# EAGLE board Board (EAGLE 9.7.0)
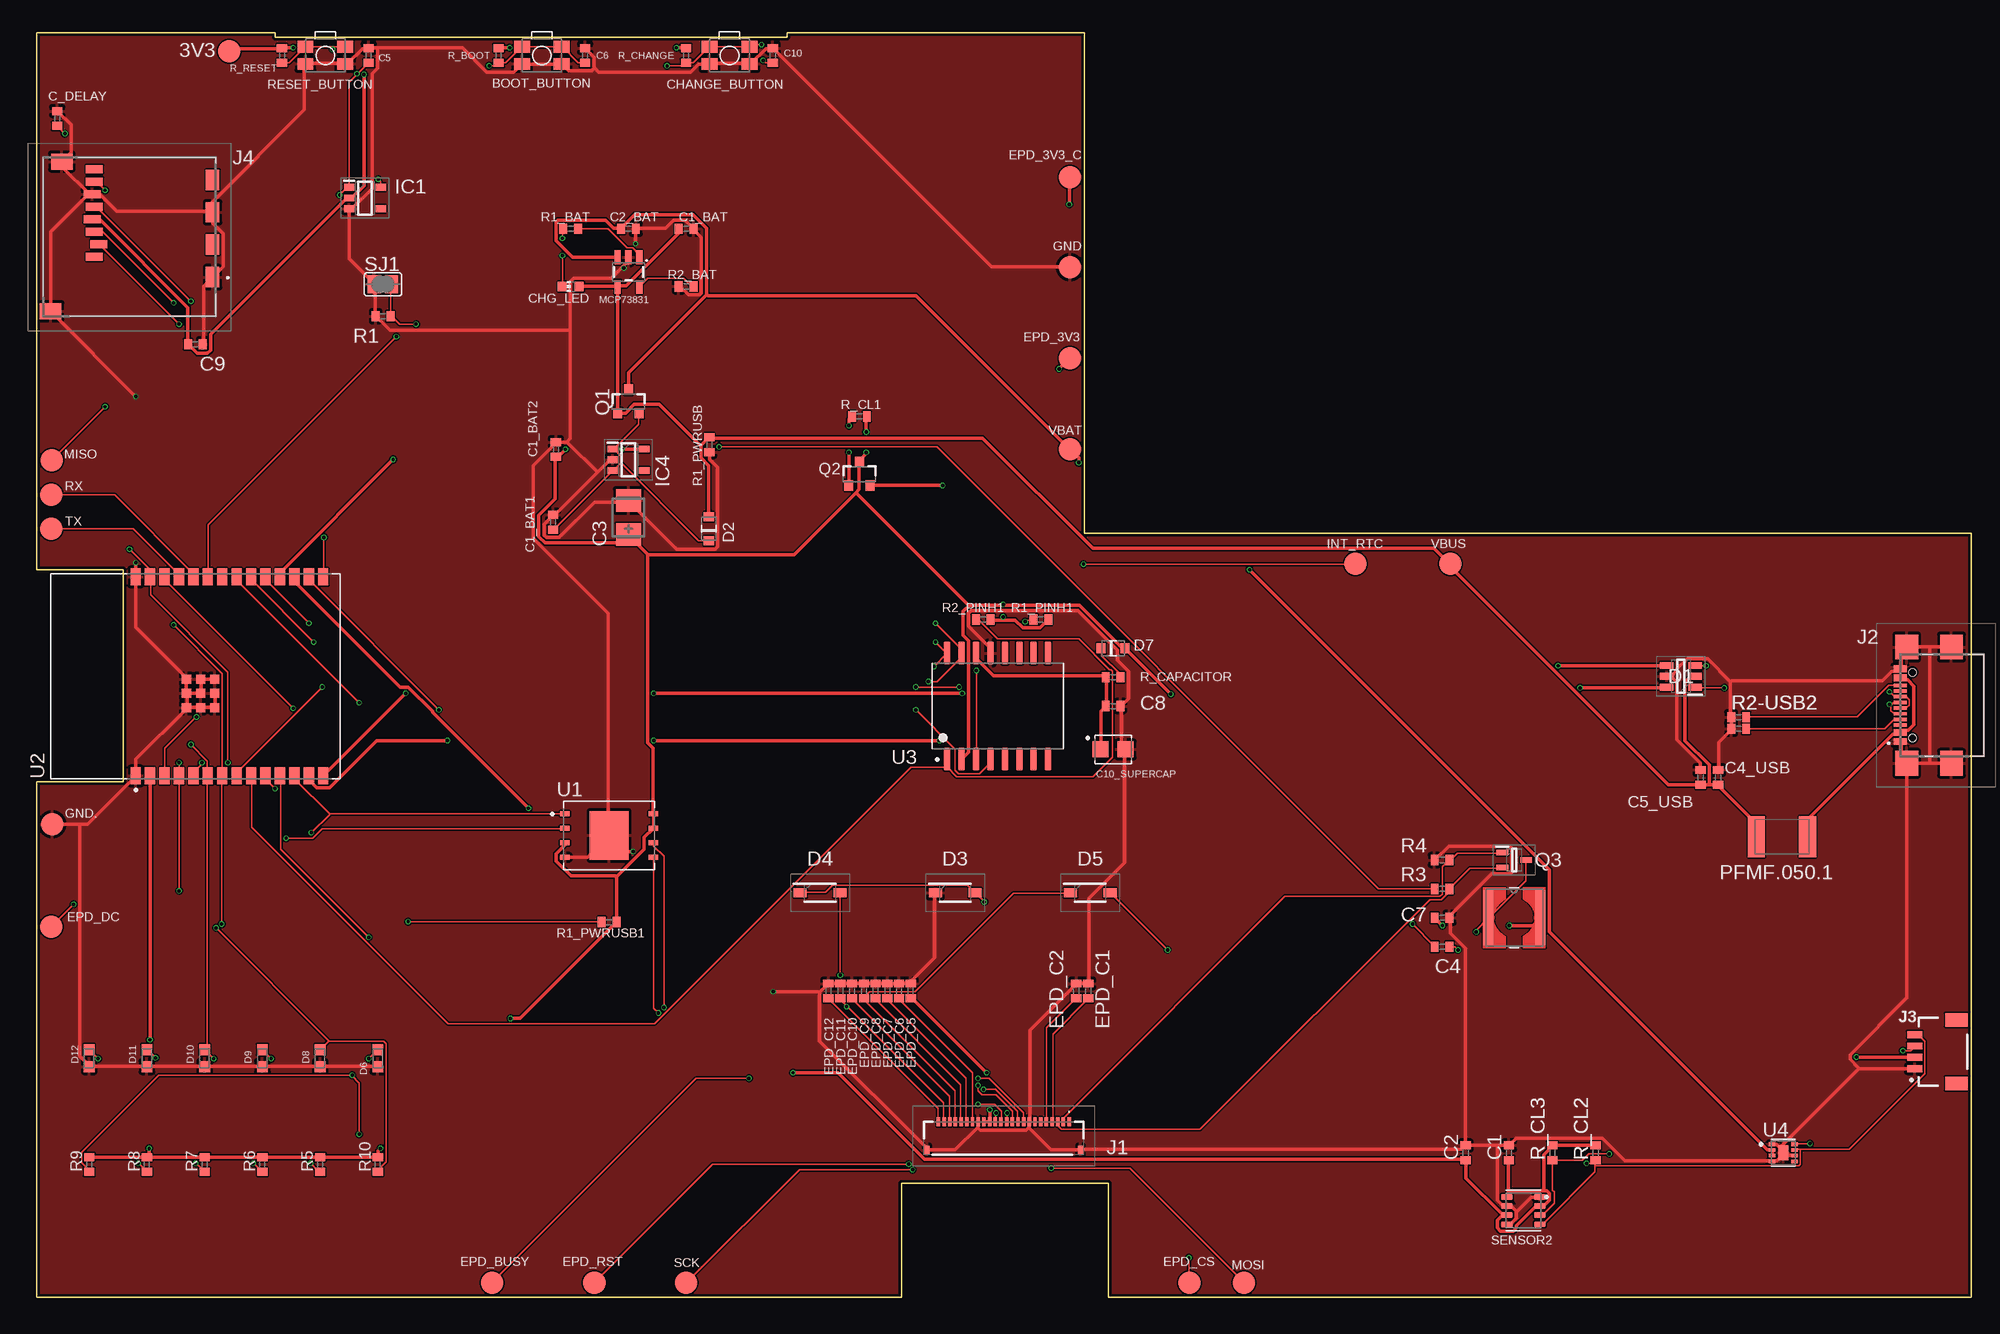
[diagram p0: board, top side]
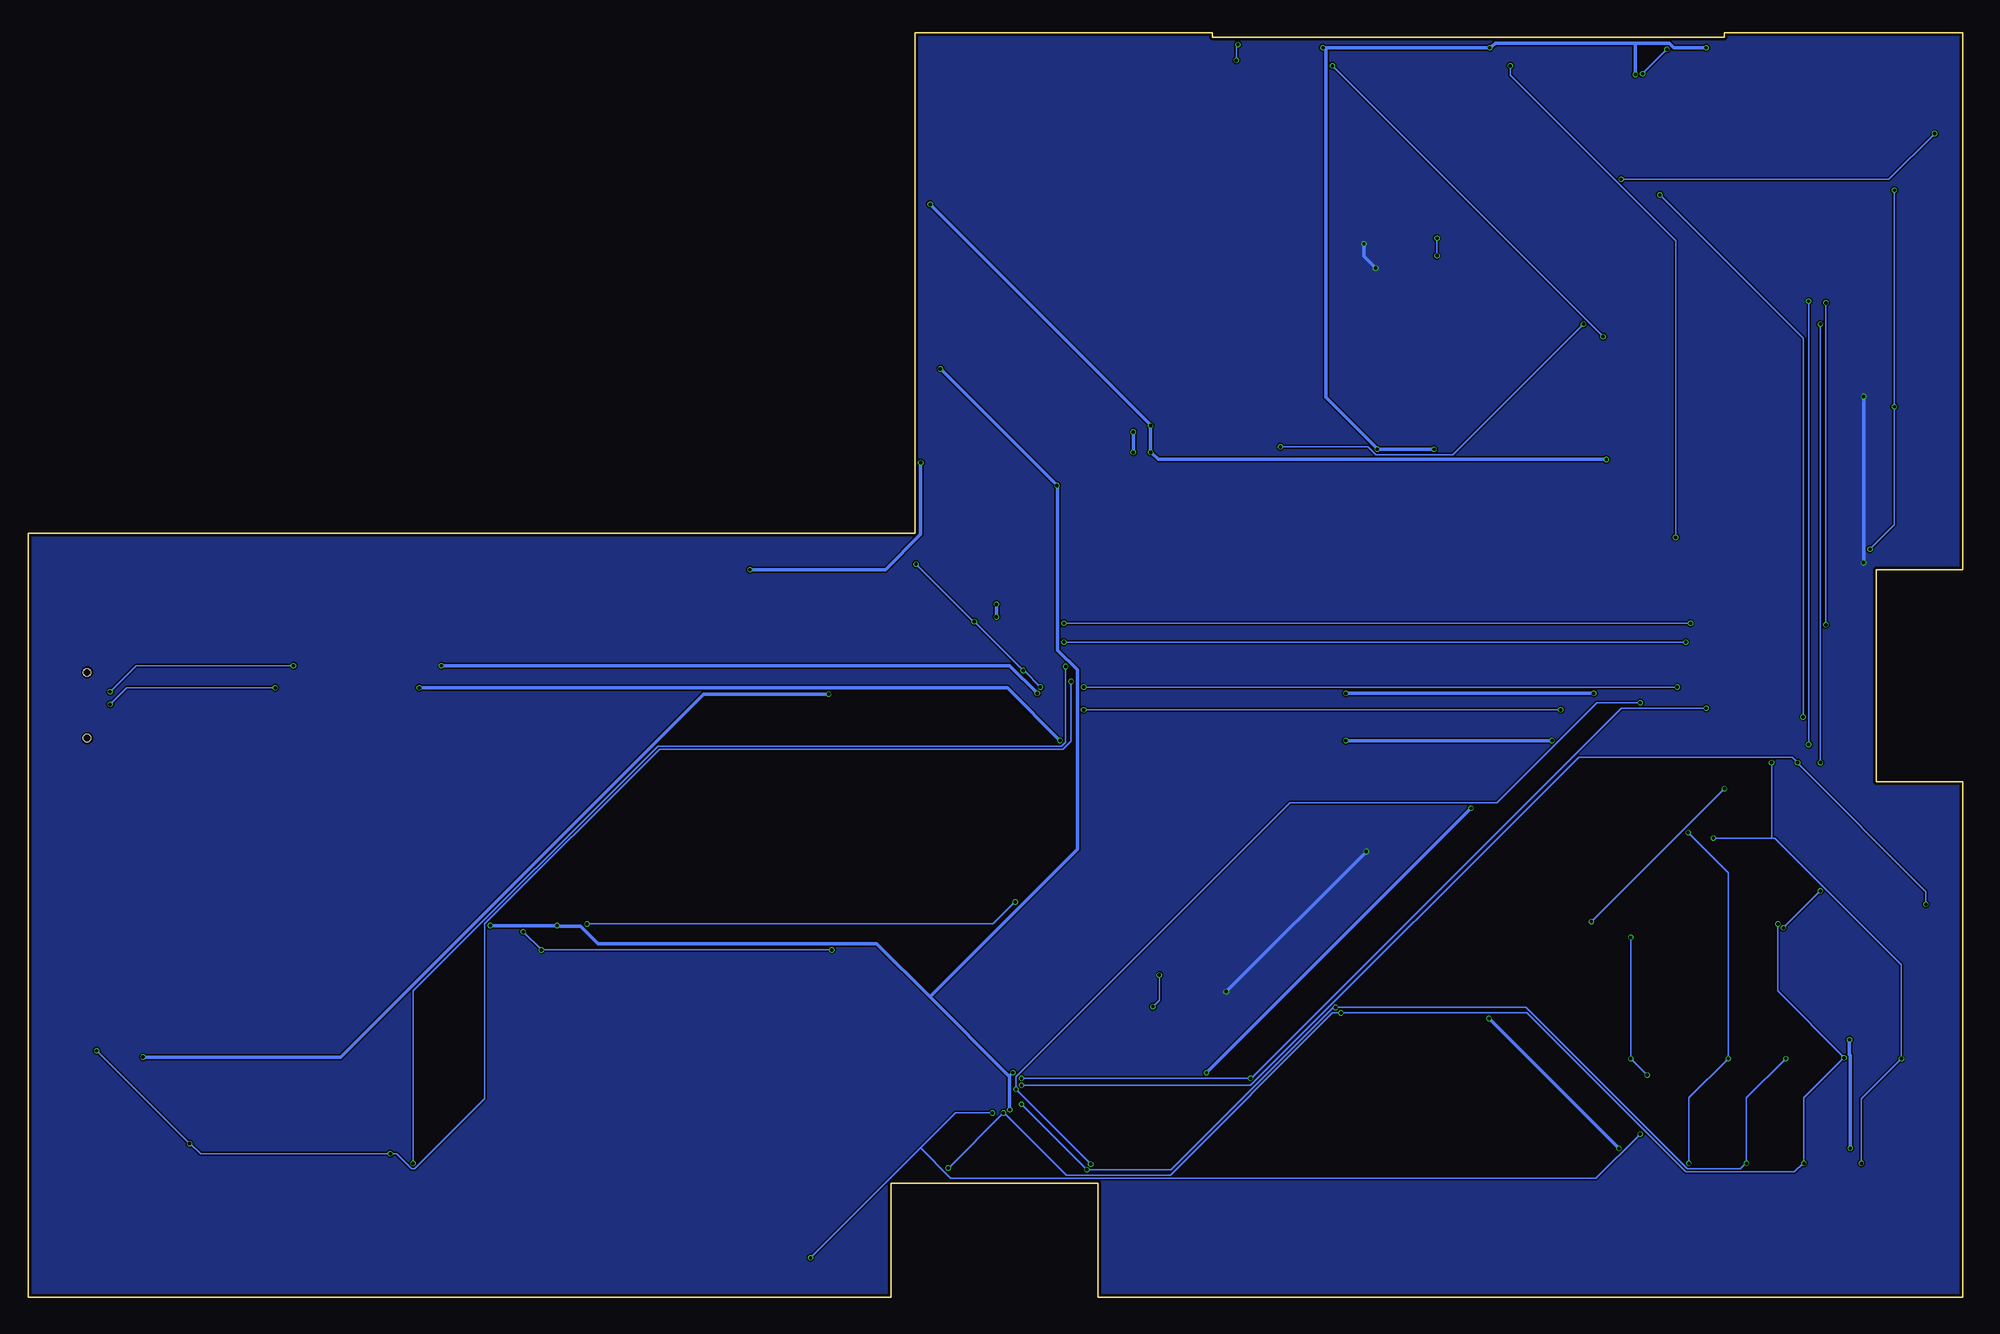
[diagram p1: board, bottom side, seen from below]

Size 170.2 x 111.2 mm. Coordinates in mm from the lower left corner, seen from the top.
Outline: 0,0 76.11,0 76.11,10 94.31,10 94.31,0 170.2,0 170.2,67.2 92.19,67.2 92.19,111.2 66.04,111.2 66.04,110.83 21,110.83 21,111.2 0,111.2 0,64 7.62,64 7.62,45.35 0,45.35 0,0
Copper layers (1*16): Top 0.035mm / dielectric 1.6mm / Bottom 0.035mm
Design rules "jlcpcb-2layers.dru *": minimum track width 0.15mm, minimum drill 0.3mm, track to track 5mil, track to pad 5mil, pad to pad 5mil, via to via 5mil, smd to smd 0.1mm, copper to edge 0.2mm, drill to drill 6mil, minimum pad ring 10mil, minimum via ring 3mil, stop-mask expansion 4mil, vias tented up to drill 0mil, thermal gap 10mil
Net classes: 0 default: width 0.15 mm; 1 Copper Power Pins: width 0.3 mm

## Footprints (pad centres in the part's own frame; a part is rotated, then mirrored left to right if it is on the bottom)
TP20R = smd 2 x 2: TP 0,0
MYBUTTON = smd 1.4 x 1.05: 1 1.75,0.75; 2 -1.75,0.75; 3 -1.75,-0.75; 4 1.75,-0.75
EAGLE-LTSPICE_C0402 = smd 0.7 x 0.9: 1 -0.65,0; 2 0.65,0
RCL_CT3528 = smd 2 x 2.2: + -1.5,0; - 1.5,0
ESP32_WROVER_EAGLE-LTSPICE_C0402 = smd 0.7 x 0.9: 1 -0.65,0; 2 0.65,0
CAPCP3225X100N = smd 1.4 x 1.4: 1 -1.1,0; 2 1.1,0
ADAFRUIT_CHIP-LED0603 = smd 0.8 x 0.8: A 0,-0.75; C 0,0.75
SOT95P280X145-6N = smd 1.2 x 0.6: 1 -1.25,0.95; 2 -1.25,0; 3 -1.25,-0.95; 4 1.25,-0.95; 5 1.25,0; 6 1.25,0.95
ESP32_WROVER_AVX---SD0805S020S1R0_AVX_SD0805S020S1R0_0 = smd 0.8 x 0.9: 1 -1.05,0; 2 1.05,0
SOD3716X135N = smd 1.15 x 0.8: 1 -1.75,0; 2 1.75,0
DIOC1608X36N = smd 0.97 x 0.94: 1 -0.75,0; 2 0.75,0
SOT95P280X125-5N = smd 0.9 x 0.6: 1 -1.4,0.95; 2 -1.4,0; 3 -1.4,-0.95; 4 1.4,-0.95; 5 1.4,0.95
SOT95P280X120-5N = smd 0.9 x 0.6: 1 -1.4,0.95; 2 -1.4,0; 3 -1.4,-0.95; 4 1.4,-0.95; 5 1.4,0.95
FH34SRJ24S05SH99 = smd 0.3 x 0.8: 1 5.75,1.45; 2 5.25,1.45; 3 4.75,1.45; 4 4.25,1.45; 5 3.75,1.45; 6 3.25,1.45; 7 2.75,1.45; 8 2.25,1.45; 9 1.75,1.45; 10 1.25,1.45; 11 0.75,1.45; 12 0.25,1.45; 13 -0.25,1.45; 14 -0.75,1.45; 15 -1.25,1.45; 16 -1.75,1.45; 17 -2.25,1.45; 18 -2.75,1.45; 19 -3.25,1.45; 20 -3.75,1.45; 21 -4.25,1.45; 22 -4.75,1.45; 23 -5.25,1.45; 24 -5.75,1.45 | smd 0.4 x 0.8: MP1 6.75,-1.05; MP2 -6.75,-1.05
SAMACSYS_PARTS_USB4110GFA = smd 0.3 x 1.15: A1 -3.35,3.678; A4 -2.55,3.678; A5 -1.25,3.678; A6 -0.25,3.678; A7 0.25,3.678; A8 1.25,3.678; A9 2.55,3.678; A12 3.35,3.678; B1 3.05,3.678; B4 2.25,3.678; B5 1.75,3.678; B6 0.75,3.678; B7 -0.75,3.678; B8 -1.75,3.678; B9 -2.25,3.678; B12 -3.05,3.678 | smd 2.18 x 2: MP1 -5.11,-0.827; MP2 5.11,-0.827; MP3 -5.11,3.103; MP4 5.11,3.103 | hole 0.65: -2.89,2.603; 2.89,2.603
JST04_1MM_RA = smd 0.6 x 1.35: 1 -1.5,0; 2 -0.5,0; 3 0.5,0; 4 1.5,0 | smd 1.2 x 2: NC1 2.8,-3.675; NC2 -2.8,-3.675
112ATAARR03ATTEND = smd 1.8 x 1.2: G1 10.6,10.4; G2 4.9,10.4; S1 7.75,10.4; S2 2.05,10.4 | smd 1.4 x 1.9: G3 13.6,-3.85; G4 0.45,-2.85 | smd 0.7 x 1.5: P1 8.8,0; P2 7.7,0.4; P3 6.6,0; P4 5.5,-0.2; P5 4.4,0; P6 3.3,-0.2; P7 2.2,0; P8 1.1,0
IND_4828-WE-TPC_WRE = smd 0.889 x 4.826: 1 -2.286,0; 2 2.286,0
ESP32_WROVER_SPARKFUN-IC-POWER_SOT23-5 = smd 0.55 x 1.2: 1 -0.95,-1.3; 2 0,-1.3; 3 0.95,-1.3; 4 0.95,1.3; 5 -0.95,1.3
ESP32C6_VARISTOR_CT/CN1812 = smd 1.5 x 3.6: 1 -2.25,0; 2 2.25,0
ESP32_WROVER_SPARKFUN-DISCRETESEMI_SOT23-3 = smd 0.8 x 0.9: 1 -0.95,-1; 2 0.95,-1; 3 0,1.1
SOT65P210X110-3N = smd 1.05 x 0.5: 1 -1.05,0.65; 2 -1.05,-0.65; 3 1.05,0
ESP32_WROVER_EAGLE-LTSPICE_R0402 = smd 0.7 x 0.9: 1 -0.65,0; 2 0.65,0
ESP32_WROVER_BME680_PSON80P300X300X100-8N = smd 1.016 x 0.5: 1 1.458,1.2; 2 1.458,0.4; 3 1.458,-0.4; 4 1.458,-1.2; 5 -1.458,-1.22; 6 -1.458,-0.4; 7 -1.458,0.4; 8 -1.458,1.2
SJ = smd 1.168 x 1.6: 1 -0.762,0; 2 0.762,0
SON127P600X800X80-9N = smd 0.94 x 0.44: 1 -3.895,1.905; 2 -3.895,0.635; 3 -3.895,-0.635; 4 -3.895,-1.905; 5 3.895,-1.905; 6 3.895,-0.635; 7 3.895,0.635; 8 3.895,1.905 | smd 3.4 x 4.3: 9 0,0
XCVR_ESP32-C6-WROOM-1-N8 = smd 1.5 x 0.9: 1 -8.75,5.26; 2 -8.75,3.99; 3 -8.75,2.72; 4 -8.75,1.45; 5 -8.75,0.18; 6 -8.75,-1.09; 7 -8.75,-2.36; 8 -8.75,-3.63; 9 -8.75,-4.9; 10 -8.75,-6.17; 11 -8.75,-7.44; 12 -8.75,-8.71; 13 -8.75,-9.98; 14 -8.75,-11.25; 15 8.75,-11.25; 16 8.75,-9.98; 17 8.75,-8.71; 18 8.75,-7.44; 19 8.75,-6.17; 20 8.75,-4.9; 21 8.75,-3.63; 22 8.75,-2.36; 23 8.75,-1.09; 24 8.75,0.18; 25 8.75,1.45; 26 8.75,2.72; 27 8.75,3.99; 28 8.75,5.26 | smd 0.8 x 0.8: 29_1 -2.755,0.79; 29_2 -1.505,0.79; 29_3 -0.255,0.79; 29_4 -2.755,-0.46; 29_5 -1.505,-0.46; 29_6 -0.255,-0.46; 29_7 -2.755,-1.71; 29_8 -1.505,-1.71; 29_9 -0.255,-1.71
SOIC127P1032X265-16N = smd 2.05 x 0.59: 1 -4.655,4.445; 2 -4.655,3.175; 3 -4.655,1.905; 4 -4.655,0.635; 5 -4.655,-0.635; 6 -4.655,-1.905; 7 -4.655,-3.175; 8 -4.655,-4.445; 9 4.655,-4.445; 10 4.655,-3.175; 11 4.655,-1.905; 12 4.655,-0.635; 13 4.655,0.635; 14 4.655,1.905; 15 4.655,3.175; 16 4.655,4.445
SON50P200X200X80-9N = smd 0.635 x 0.305: 1 -0.985,0.75; 2 -0.985,0.25; 3 -0.985,-0.25; 4 -0.985,-0.75; 5 0.985,-0.75; 6 0.985,-0.25; 7 0.985,0.25; 8 0.985,0.75 | smd 0.9 x 1.3: 9 0,0

## Placement (x,y rotation side)
3V3  TPTP20R  [TP20R]  16.95,109.6 0 top
BOOT_BUTTON  BUTTON_CUSYOMV1  [MYBUTTON]  44.45,109.22 180 top
C1  100nF  [EAGLE-LTSPICE_C0402]  129.54,12.7 90 top
C1_BAT  4.7uF  [EAGLE-LTSPICE_C0402]  57.15,93.98 0 top
C1_BAT1  4.7uF  [EAGLE-LTSPICE_C0402]  45.45,68.16 90 top
C1_BAT2  4.7uF  [EAGLE-LTSPICE_C0402]  45.69,74.56 90 top
C2  100nF  [EAGLE-LTSPICE_C0402]  125.73,12.7 90 top
C2_BAT  4.7uF  [EAGLE-LTSPICE_C0402]  52.07,93.98 0 top
C3  100uF TANT  [RCL_CT3528]  52.07,68.58 90 top
C4  4.7uF/25V  [EAGLE-LTSPICE_C0402]  123.65,30.83 0 top
C4_USB  100nF  [ESP32_WROVER_EAGLE-LTSPICE_C0402]  147.94,45.72 90 top
C5  1uF  [EAGLE-LTSPICE_C0402]  29.21,109.22 90 top
C5_USB  4.7uF  [ESP32_WROVER_EAGLE-LTSPICE_C0402]  146.4,45.72 90 top
C6  100nF  [EAGLE-LTSPICE_C0402]  48.26,109.22 90 top
C7  10uF  [EAGLE-LTSPICE_C0402]  123.65,33.37 0 top
C8  100nF  [EAGLE-LTSPICE_C0402]  94.71,51.99 0 top
C9  100nF  [ESP32_WROVER_EAGLE-LTSPICE_C0402]  13.97,83.82 0 top
C10  100nF  [EAGLE-LTSPICE_C0402]  64.77,109.22 90 top
C10_SUPERCAP  CPH3225A  [CAPCP3225X100N]  94.71,48.18 0 top
C_DELAY  100nF  [EAGLE-LTSPICE_C0402]  1.81,103.68 90 top
CHANGE_BUTTON  BUTTON_CUSYOMV1  [MYBUTTON]  60.96,109.22 180 top
CHG_LED  [ADAFRUIT_CHIP-LED0603]  46.99,88.9 90 top
D1  USBLC6-2SC6Y  [SOT95P280X145-6N]  144.67,54.61 180 top
D2  ESP32_WROVER_AVX---SD0805S020S1R0_AVX_SD0805S020S1R0_0_0AVX_SD0805S020S1R0_0_0  [ESP32_WROVER_AVX---SD0805S020S1R0_AVX_SD0805S020S1R0_0]  59.15,67.58 90 top
D3  MBR0530  [SOD3716X135N]  80.82,35.56 0 top
D4  MBR0530  [SOD3716X135N]  68.93,35.56 0 top
D5  MBR0530  [SOD3716X135N]  92.71,35.56 0 top
D6  PGB1010603MR  [DIOC1608X36N]  30.02,21.02 90 top
D7  ESP32_WROVER_AVX---SD0805S020S1R0_AVX_SD0805S020S1R0_0_0AVX_SD0805S020S1R0_0_0  [ESP32_WROVER_AVX---SD0805S020S1R0_AVX_SD0805S020S1R0_0]  94.71,57.07 0 top
D8  PGB1010603MR  [DIOC1608X36N]  24.94,21.02 90 top
D9  PGB1010603MR  [DIOC1608X36N]  19.86,21.02 90 top
D10  PGB1010603MR  [DIOC1608X36N]  14.78,21.02 90 top
D11  PGB1010603MR  [DIOC1608X36N]  9.7,21.02 90 top
D12  PGB1010603MR  [DIOC1608X36N]  4.62,21.02 90 top
EPD_3V3  TPTP20R  [TP20R]  90.92,82.6 0 top
EPD_3V3_C  TPTP20R  [TP20R]  90.92,98.52 0 top
EPD_BUSY  TPTP20R  [TP20R]  40.07,1.28 0 top
EPD_C1  1uF/50V  [EAGLE-LTSPICE_C0402]  92.52,26.94 270 top
EPD_C2  1uF/50V  [EAGLE-LTSPICE_C0402]  91.47,26.94 270 top
EPD_C5  1uF/50V  [EAGLE-LTSPICE_C0402]  76.9,26.94 270 top
EPD_C6  1uF/50V  [EAGLE-LTSPICE_C0402]  75.87,26.94 270 top
EPD_C7  1uF/50V  [EAGLE-LTSPICE_C0402]  74.85,26.94 270 top
EPD_C8  1uF/50V  [EAGLE-LTSPICE_C0402]  73.82,26.94 270 top
EPD_C9  1uF/50V  [EAGLE-LTSPICE_C0402]  72.79,26.94 270 top
EPD_C10  1uF/50V  [EAGLE-LTSPICE_C0402]  71.74,26.94 270 top
EPD_C11  1uF/50V  [EAGLE-LTSPICE_C0402]  70.71,26.94 270 top
EPD_C12  1uF/50V  [EAGLE-LTSPICE_C0402]  69.66,26.94 270 top
EPD_CS  TPTP20R  [TP20R]  101.42,1.28 0 top
EPD_DC  TPTP20R  [TP20R]  1.28,32.6 0 top
EPD_RST  TPTP20R  [TP20R]  49.07,1.28 0 top
GND  TPTP20R  [TP20R]  90.92,90.6 0 top
GND.  TPTP20R  [TP20R]  1.39,41.6 0 top
IC1  BD5229G-TR  [SOT95P280X125-5N]  28.89,96.68 0 top
IC4  XC6220A331MR-G  [SOT95P280X120-5N]  52.07,73.66 0 top
INT_RTC  TPTP20R  [TP20R]  116.02,64.52 0 top
J1  FH34SRJ-24S-0.5SH_99_  [FH34SRJ24S05SH99]  85.09,13.97 0 top
J2  SAMACSYS_PARTS_USB4110-GF-A  [SAMACSYS_PARTS_USB4110GFA]  167.64,52.07 90 top
J3  QWIIC_RIGHT_ANGLE  [JST04_1MM_RA]  165.25,21.59 90 top
J4  112A-TAAR-R03_ATTEND  [112ATAARR03ATTEND]  5.08,100.33 270 top
L1  744043680IND_4828-WE-TPC_WRE  [IND_4828-WE-TPC_WRE]  130,33.37 0 top
MCP73831  ESP32_WROVER_SPARKFUN-IC-POWER_MCP73831  [ESP32_WROVER_SPARKFUN-IC-POWER_SOT23-5]  52.07,90.17 180 top
MISO  TPTP20R  [TP20R]  1.31,73.6 0 top
MOSI  TPTP20R  [TP20R]  106.23,1.28 0 top
PFMF.050.1  ESP32C6_VARISTORCN1812  [ESP32C6_VARISTOR_CT/CN1812]  153.56,40.5 180 top
Q1  20V/4.2A/52mΩ/1.4W  [ESP32_WROVER_SPARKFUN-DISCRETESEMI_SOT23-3]  52.07,78.74 0 top
Q2  20V/4.2A/52mΩ/1.4W  [ESP32_WROVER_SPARKFUN-DISCRETESEMI_SOT23-3]  72.39,72.39 0 top
Q3  SI1308EDL-T1-GE3  [SOT65P210X110-3N]  130,38.45 0 top
R1  2.2  [ESP32_WROVER_EAGLE-LTSPICE_R0402]  30.48,86.28 0 top
R1_BAT  200  [ESP32_WROVER_EAGLE-LTSPICE_R0402]  46.99,93.98 0 top
R1_PINH1  10k  [ESP32_WROVER_EAGLE-LTSPICE_R0402]  88.36,59.61 0 top
R1_PWRUSB  100k  [ESP32_WROVER_EAGLE-LTSPICE_R0402]  59.19,74.98 90 top
R1_PWRUSB1  100k  [ESP32_WROVER_EAGLE-LTSPICE_R0402]  50.37,32.99 0 top
R2-USB1  5k1  [ESP32_WROVER_EAGLE-LTSPICE_R0402]  149.75,49.99 0 top
R2-USB2  5k1  [ESP32_WROVER_EAGLE-LTSPICE_R0402]  149.75,51.02 0 top
R2_BAT  2k  [ESP32_WROVER_EAGLE-LTSPICE_R0402]  57.15,88.9 0 top
R2_PINH1  10k  [ESP32_WROVER_EAGLE-LTSPICE_R0402]  83.28,59.61 0 top
R3  0.47  [ESP32_WROVER_EAGLE-LTSPICE_R0402]  123.65,35.91 0 top
R4  10k  [ESP32_WROVER_EAGLE-LTSPICE_R0402]  123.65,38.45 0 top
R5  10k  [ESP32_WROVER_EAGLE-LTSPICE_R0402]  24.94,11.67 90 top
R6  10k  [ESP32_WROVER_EAGLE-LTSPICE_R0402]  19.86,11.67 90 top
R7  10k  [ESP32_WROVER_EAGLE-LTSPICE_R0402]  14.78,11.67 90 top
R8  10k  [ESP32_WROVER_EAGLE-LTSPICE_R0402]  9.7,11.67 90 top
R9  10k  [ESP32_WROVER_EAGLE-LTSPICE_R0402]  4.62,11.67 90 top
R10  10k  [ESP32_WROVER_EAGLE-LTSPICE_R0402]  30.02,11.67 90 top
R_BOOT  10k  [ESP32_WROVER_EAGLE-LTSPICE_R0402]  40.64,109.22 90 top
R_CAPACITOR  15  [ESP32_WROVER_EAGLE-LTSPICE_R0402]  94.71,54.53 0 top
R_CHANGE  10k  [ESP32_WROVER_EAGLE-LTSPICE_R0402]  57.15,109.22 90 top
R_CL1  10k  [ESP32_WROVER_EAGLE-LTSPICE_R0402]  72.39,77.47 0 top
R_CL2  10k  [ESP32_WROVER_EAGLE-LTSPICE_R0402]  137.16,12.7 90 top
R_CL3  10k  [ESP32_WROVER_EAGLE-LTSPICE_R0402]  133.35,12.7 90 top
R_RESET  10k  [ESP32_WROVER_EAGLE-LTSPICE_R0402]  21.59,109.22 90 top
RESET_BUTTON  BUTTON_CUSYOMV1  [MYBUTTON]  25.4,109.22 180 top
RX  TPTP20R  [TP20R]  1.28,70.6 0 top
SCK  TPTP20R  [TP20R]  57.15,1.28 0 top
SENSOR2  ESP32_WROVER_BME680_BME680  [ESP32_WROVER_BME680_PSON80P300X300X100-8N]  130.81,7.62 0 top
SJ1  [SJ]  30.48,89.09 0 top
TX  TPTP20R  [TP20R]  1.28,67.6 0 top
U1  W25Q512JVEIQ  [SON127P600X800X80-9N]  50.37,40.61 0 top
U2  ESP32-C6-WROOM-1-N8  [XCVR_ESP32-C6-WROOM-1-N8]  13.97,54.61 90 top
U3  DS3231SN#  [SOIC127P1032X265-16N]  84.55,51.99 90 top
U4  MAX17048G+T10  [SON50P200X200X80-9N]  153.67,12.7 0 top
VBAT  TPTP20R  [TP20R]  90.92,74.6 0 top
VBUS  TPTP20R  [TP20R]  124.37,64.52 0 top

## Library data of the parts
3V3 BOOT_BUTTON CHANGE_BUTTON CHG_LED EPD_3V3 EPD_3V3_C EPD_BUSY EPD_CS EPD_DC EPD_RST GND GND. INT_RTC MISO MOSI PFMF.050.1 RESET_BUTTON RX SCK SJ1 TX VBAT VBUS = DeskAssistant_v19_v1
C1 C1_BAT C1_BAT1 C1_BAT2 C2 C2_BAT C4 C4_USB C5 C5_USB C6-C10 C_DELAY EPD_C1 EPD_C2 EPD_C5-EPD_C12 = DeskAssistant_v19_v1; SPICEMODEL: NONE; SPICEPREFIX: C
C3 = DeskAssistant_v19_v1; SPICEPREFIX: C
C10_SUPERCAP = DeskAssistant_v19_v1; AVAILABILITY: Not in stock; CHECK_PRICES: https://www.snapeda.com/parts/CPH3225A/Seiko+Instruments/view-part/?ref=eda; DESCRIPTION: 11 mF (EDLC) Supercapacitor 3.3 V 1210 (3225 Metric) - -; MF: Seiko Instruments; MP: CPH3225A; PACKAGE: 1210 Seiko; PRICE: None; PURCHASE-URL: https://www.snapeda.com/api/url_track_click_mouser/?unipart_id=562593&manufacturer=Seiko Instruments&part_name=CPH3225A&search_term=None; SNAPEDA_LINK: https://www.snapeda.com/parts/CPH3225A/Seiko+Instruments/view-part/?ref=snap
D1 = DeskAssistant_v19_v1; AVAILABILITY: In Stock; CHECK_PRICES: https://www.snapeda.com/parts/USBLC6-2SC6Y/STMicroelectronics/view-part/?ref=eda; DESCRIPTION: 17V Clamp 5A (8/20µs) Ipp Tvs Diode Surface Mount SOT-23-6; MF: STMicroelectronics; MP: USBLC6-2SC6Y; PACKAGE: SOT-23-6 STMicroelectronics; PRICE: None; SNAPEDA_LINK: https://www.snapeda.com/parts/USBLC6-2SC6Y/STMicroelectronics/view-part/?ref=snap
D2 D7 = DeskAssistant_v19_v1; CENTROID_NOT_SPECIFIED: No; DATASHEET: http://datasheets.avx.com/schottky.pdf; DIGIKEY_DESCRIPTION: DIODE SCHOTTKY 20V 1A 0805; DIGIKEY_PART_NUMBER: 478-7800-1-ND; LEAD_FREE: yes; MF: AVX; MOUSER_PART_NUMBER: 581-SD0805S020S1R0; PACKAGE: 0805 (2012 metric); PREFIX: D; ROHS: yes; TEMPERATURE_RANGE_HIGH: +125°C; TEMPERATURE_RANGE_LOW: -55°C
D3-D5 = DeskAssistant_v19_v1; AVAILABILITY: In Stock; CHECK_PRICES: https://www.snapeda.com/parts/MBR0530/Onsemi/view-part/?ref=eda; DESCRIPTION: Diode Schottky 30 V 500mA Surface Mount SOD-123; MF: ON Semiconductor; MP: MBR0530; PACKAGE: SOD-123-2 ON Semiconductor; PRICE: None; PURCHASE-URL: https://www.snapeda.com/api/url_track_click_mouser/?unipart_id=179458&manufacturer=ON Semiconductor&part_name=MBR0530&search_term=None; SNAPEDA_LINK: https://www.snapeda.com/parts/MBR0530/Onsemi/view-part/?ref=snap
D6 D8-D12 = DeskAssistant_v19_v1; AVAILABILITY: In Stock; CHECK_PRICES: https://www.snapeda.com/parts/PGB1010603MR/Littelfuse/view-part/?ref=eda; DESCRIPTION: 150V (Typ) Clamp - Ipp Tvs Diode Surface Mount 0603 (1608 Metric); MF: Littelfuse Inc.; MP: PGB1010603MR; PACKAGE: 0603 Littelfuse Inc.; PRICE: None; PURCHASE-URL: https://www.snapeda.com/api/url_track_click_mouser/?unipart_id=5659453&manufacturer=Littelfuse Inc.&part_name=PGB1010603MR&search_term=None; SNAPEDA_LINK: https://www.snapeda.com/parts/PGB1010603MR/Littelfuse/view-part/?ref=snap
IC1 = DeskAssistant_v19_v1; DESCRIPTION: Voltage Detector with Adjustable Delay Time: CMOS processes are utilized to develop high precision, low current consumption CMOS reset ICs that allow arbitrary setting of the delay time. The extensive lineup includes both Nch Open Drain and CMOS output types in a wide range of detection voltages (from 2.3V to 6.0V, in 0.1V steps), enabling selection of the ideal solution based on customer requirements. In addition, the entire series is of course both lead-free and RoHS-compliant.; HEIGHT: 1.25mm; MANUFACTURER_NAME: ROHM Semiconductor; MANUFACTURER_PART_NUMBER: BD5229G-TR; MOUSER_PART_NUMBER: 755-BD5229G-TR; MOUSER_PRICE-STOCK: https://www.mouser.co.uk/ProductDetail/ROHM-Semiconductor/BD5229G-TR?qs=4kLU8WoGk0vvnhrrYwdszw%3D%3D
IC4 = DeskAssistant_v19_v1; DESCRIPTION: LDO Voltage Regulators; HEIGHT: 1.2mm; MANUFACTURER_NAME: Torex; MANUFACTURER_PART_NUMBER: XC6220A331MR-G; MOUSER_PART_NUMBER: 865-XC6220A331MR-G; MOUSER_PRICE-STOCK: https://www.mouser.co.uk/ProductDetail/Torex-Semiconductor/XC6220A331MR-G?qs=AsjdqWjXhJ8ZSWznL1J0gg%3D%3D
J1 = DeskAssistant_v19_v1; DESCRIPTION: 24 Position FFC, FPC Connector Contacts, Top and Bottom 0.020" (0.50mm) Surface Mount, Right Angle; HEIGHT: 1.1mm; MANUFACTURER_NAME: Hirose; MANUFACTURER_PART_NUMBER: FH34SRJ-24S-0.5SH(99); MOUSER_PART_NUMBER: 798-FH34SRJ24S05SH99; MOUSER_PRICE-STOCK: https://www.mouser.co.uk/ProductDetail/Hirose-Connector/FH34SRJ-24S-0.5SH99?qs=vcbW%252B4%252BSTIpKBl5ap9J8Fw%3D%3D
J2 = DeskAssistant_v19_v1; DESCRIPTION: CONN USB 2.0 TYPE-C R/A SMT; HEIGHT: 3.26mm; MANUFACTURER_NAME: GCT (GLOBAL CONNECTOR TECHNOLOGY); MANUFACTURER_PART_NUMBER: USB4110-GF-A; MOUSER_PART_NUMBER: 640-USB4110-GF-A; MOUSER_PRICE-STOCK: https://www.mouser.co.uk/ProductDetail/GCT/USB4110-GF-A?qs=KUoIvG%2F9IlYiZvIXQjyJeA%3D%3D
J3 = DeskAssistant_v19_v1; PROD_ID: CONN-13694
J4 = DeskAssistant_v19_v1; DESCRIPTION: Micro SD Card Socket, Push-Push Type, Top Mount, SMT, H=1.83mm, 10u; HEIGHT: 1.9mm; MANUFACTURER_NAME: ATTEND; MANUFACTURER_PART_NUMBER: 112A-TAAR-R03 ATTEND
L1 = DeskAssistant_v19_v1; COPYRIGHT: Copyright (C) 2024 Ultra Librarian. All rights reserved.; MANUFACTURER_PART_NUMBER: 744043680; MFR_NAME: Wurth Electronics
MCP73831 = DeskAssistant_v19_v1; PROD_ID: IC-09995
Q1 Q2 = DeskAssistant_v19_v1; PROD_ID: TRAN-14388
Q3 = DeskAssistant_v19_v1; AVAILABILITY: In Stock; CHECK_PRICES: https://www.snapeda.com/parts/SI1308EDL-T1-GE3/Vishay+Siliconix/view-part/?ref=eda; DESCRIPTION: Si1308EDL-T1-GE3 N-channel MOSFET Transistor, 1.5 A, 30 V, 3-Pin SC-70 | Siliconix / Vishay SI1308EDL-T1-GE3; MF: Vishay Siliconix; MP: SI1308EDL-T1-GE3; PACKAGE: SOT-323 Vishay Semiconductor; PRICE: None; PURCHASE-URL: https://www.snapeda.com/api/url_track_click_mouser/?unipart_id=274603&manufacturer=Vishay Siliconix&part_name=SI1308EDL-T1-GE3&search_term=None; SNAPEDA_LINK: https://www.snapeda.com/parts/SI1308EDL-T1-GE3/Vishay+Siliconix/view-part/?ref=snap
R1 R1_BAT R1_PINH1 R1_PWRUSB R1_PWRUSB1 R2-USB1 R2-USB2 R2_BAT R2_PINH1 R3-R10 R_BOOT R_CAPACITOR R_CHANGE R_CL1-R_CL3 R_RESET = DeskAssistant_v19_v1; SPICEMODEL: NONE; SPICEPREFIX: R
SENSOR2 = DeskAssistant_v19_v1; AVAILABILITY: Unavailable; DESCRIPTION: Integrated Environmental Unit; MF: Bosch Sensortec; MP: BME680; PACKAGE: LGA-8 Bosch Tools; PRICE: None
U1 = DeskAssistant_v19_v1; AVAILABILITY: In Stock; CHECK_PRICES: https://www.snapeda.com/parts/W25Q512JVEIQ/Winbond+Electronics/view-part/?ref=eda; DESCRIPTION: FLASH - NOR Memory IC 512Mb (64M x 8) SPI - Quad I/O 133 MHz 8-WSON (8x6); MF: Winbond Electronics; MP: W25Q512JVEIQ; PACKAGE: Package; PRICE: None; SNAPEDA_LINK: https://www.snapeda.com/parts/W25Q512JVEIQ/Winbond+Electronics/view-part/?ref=snap
U2 = DeskAssistant_v19_v1; AVAILABILITY: In Stock; CHECK_PRICES: https://www.snapeda.com/parts/ESP32-C6-WROOM-1-N8/Espressif+Systems/view-part/?ref=eda; DESCRIPTION: Multiprotocol Modules ESP32-C6 module, Wi-Fi 6 in 2.4 GHz band, Bluetooth 5, Zigbee 3.0 and Thread. ESP34-WROOM Compatible - ENGINEERING SAMPLE; MF: Espressif Systems; MP: ESP32-C6-WROOM-1-N8; PACKAGE: None; PRICE: None; SNAPEDA_LINK: https://www.snapeda.com/parts/ESP32-C6-WROOM-1-N8/Espressif+Systems/view-part/?ref=snap
U3 = DeskAssistant_v19_v1; AVAILABILITY: In Stock; CHECK_PRICES: https://www.snapeda.com/parts/DS3231SN%23/Analog+Devices/view-part/?ref=eda; DESCRIPTION: Extremely Accurate I²C-Integrated RTC/TCXO/Crystal; MF: Analog Devices; MP: DS3231SN#; PACKAGE: SOIC-16 Maxim; PRICE: None; PURCHASE-URL: https://www.snapeda.com/api/url_track_click_mouser/?unipart_id=99048&manufacturer=Analog Devices&part_name=DS3231SN#&search_term=None; SNAPEDA_LINK: https://www.snapeda.com/parts/DS3231SN%23/Analog+Devices/view-part/?ref=snap
U4 = DeskAssistant_v19_v1; AVAILABILITY: In Stock; CHECK_PRICES: https://www.snapeda.com/parts/MAX17048G+T10/Analog+Devices/view-part/?ref=eda; DESCRIPTION: 3µA 1-Cell/2-Cell Fuel Gauge with ModelGauge; MF: Analog Devices; MP: MAX17048G+T10; PACKAGE: TDFN-8 Maxim; PRICE: None; PURCHASE-URL: https://www.snapeda.com/api/url_track_click_mouser/?unipart_id=329239&manufacturer=Analog Devices&part_name=MAX17048G+T10&search_term=None; SNAPEDA_LINK: https://www.snapeda.com/parts/MAX17048G+T10/Analog+Devices/view-part/?ref=snap

## Nets
3V3 [Copper Power Pins]: 3V3.TP C1_BAT2.1 C3.+ C9.1 D7.2 IC1.2 IC4.5 J3.2 J4.P4 Q2.3 R1_PINH1.2 R1_PWRUSB1.2 R2_PINH1.2 R5.2 R6.2 R7.2 R8.2 R9.2 R10.2 R_BOOT.2 R_CHANGE.2 R_CL1.2 R_RESET.2 U1.3 U1.7 U1.8 U2.2 U3.2
32KHZ: R2_PINH1.1 U2.9 U3.1
DN: D1.1 J2.A7 J2.B7
DP: D1.3 J2.A6 J2.B6
EPD_3V3 [Copper Power Pins]: C7.1 EPD_3V3.TP EPD_C5.2 J1.15 J1.16 L1.2 Q2.2
EPD_3V3_C [Copper Power Pins]: EPD_3V3_C.TP Q2.1 R_CL1.1 U2.18
EPD_BUSY: EPD_BUSY.TP J1.9 U2.26
EPD_CS: D6.2 EPD_CS.TP J1.12 R9.1 U2.11
EPD_DC: EPD_DC.TP J1.11 U2.5
EPD_RST: EPD_RST.TP J1.10 U2.21
FLASH_CS: D9.2 R5.1 U1.1 U2.12
GDR: J1.2 Q3.1 R4.2
GND [Copper Power Pins]: BOOT_BUTTON.1 BOOT_BUTTON.2 C1.2 C1_BAT1.2 C1_BAT2.2 C1_BAT.2 C2.2 C2_BAT.2 C3.- C4_USB.2 C5.2 C5_USB.2 C6.2 C7.2 C8.2 C9.2 C10.2 C10_SUPERCAP.2 C_DELAY.2 CHANGE_BUTTON.1 CHANGE_BUTTON.2 D1.5 D3.1 D6.1 D8.1 D9.1 D10.1 D11.1 D12.1 EPD_C1.1 EPD_C2.1 EPD_C5.1 EPD_C6.1 EPD_C7.1 EPD_C8.1 EPD_C9.1 EPD_C10.1 EPD_C11.1 EPD_C12.1 GND..TP GND.TP IC1.3 IC4.2 J1.8 J1.17 J1.MP1 J1.MP2 J2.A1 J2.A12 J2.B1 J2.B12 J2.MP1 J2.MP2 J2.MP3 J2.MP4 J3.1 J4.G1 J4.G2 J4.G3 J4.G4 J4.P6 MCP73831.2 R1.1 R1_PWRUSB.1 R2-USB1.1 R2-USB2.1 R2_BAT.1 R4.1 RESET_BUTTON.1 RESET_BUTTON.2 SENSOR2.1 SENSOR2.5 SENSOR2.7 SJ1.1 U1.4 U1.9 U2.1 U2.28 U2.29_1 U2.29_2 U2.29_3 U2.29_4 U2.29_5 U2.29_6 U2.29_7 U2.29_8 U2.29_9 U3.13 U4.1 U4.4 U4.6 U4.9
GPIO8: R1_PWRUSB1.1 U2.10
I2C_PW [Copper Power Pins]: C1.1 C2.1 R_CL2.2 R_CL3.2 SENSOR2.2 SENSOR2.6 SENSOR2.8 U2.17
INT_RTC: INT_RTC.TP R1_PINH1.1 U2.8 U3.3
IO/BOOT: BOOT_BUTTON.3 BOOT_BUTTON.4 C6.1 R_BOOT.1 U2.15
IO/CHANGE: C10.1 CHANGE_BUTTON.3 CHANGE_BUTTON.4 R_CHANGE.1 U2.23
MISO: D12.2 J4.P7 MISO.TP R8.1 U1.2 U2.27
MOSI: D11.2 J1.14 J4.P3 MOSI.TP R7.1 U1.5 U2.7
N$1: J2.A5 R2-USB1.2
N$2: J2.B5 R2-USB2.2
N$3: C1_BAT1.1 D2.1 IC4.1 IC4.3 Q1.2
N$4: CHG_LED.C R1_BAT.1
N$5: MCP73831.5 R2_BAT.2
N$6: C4.1 D3.2 D4.1
N$7: MCP73831.1 R1_BAT.2
N$8: EPD_C12.2 J1.24
N$9: C_DELAY.1 IC1.5
N$10: EPD_C10.2 J1.22
N$11: EPD_C1.2 J1.4
N$12: EPD_C2.2 J1.5
N$13: D7.1 R_CAPACITOR.2
N$14: EPD_C8.2 J1.20
N$15: EPD_C7.2 J1.19
N$16: EPD_C6.2 J1.18
PREVGH: D5.1 EPD_C9.2 J1.21
PREVGL: D4.2 EPD_C11.2 J1.23
RESE: J1.3 Q3.2 R3.2
RESE': R1.2 R3.1 SJ1.2
RESET: C5.1 IC1.1 R_RESET.1 RESET_BUTTON.3 RESET_BUTTON.4 U2.3
RTC_RST: U2.16 U3.4
RX: RX.TP U2.24
SCK: D10.2 J1.13 J4.P5 R6.1 SCK.TP U1.6 U2.6
SCL: J3.4 R_CL2.1 SENSOR2.4 U2.20 U3.16 U4.7
SDA: J3.3 R_CL3.1 SENSOR2.3 U2.19 U3.15 U4.8
SRC: C4.2 D5.2 L1.1 Q3.3
SS_SD: D8.2 J4.P2 R10.1 U2.4
TX: TX.TP U2.25
USB_D+ [Copper Power Pins]: D1.4 U2.14
USB_D- [Copper Power Pins]: D1.6 U2.13
VBAT [Copper Power Pins]: C2_BAT.1 MCP73831.3 Q1.3 U4.2 U4.3 VBAT.TP
VBUS [Copper Power Pins]: C1_BAT.1 C4_USB.1 C5_USB.1 CHG_LED.A D1.2 D2.2 MCP73831.4 PFMF.050.1.2 Q1.1 R1_PWRUSB.2 VBUS.TP
VRTC [Copper Power Pins]: C8.1 C10_SUPERCAP.1 R_CAPACITOR.1 U3.14
VUSB [Copper Power Pins]: J2.A4 J2.A9 J2.B4 J2.B9 PFMF.050.1.1

## Tracks (layer width: path | path; a pad name or v marks a point on that pad's centre or on a via)
3V3  (via drill 0.3)
  Top 0.3: 85.04,59.55 86.08,59.55 86.77,58.86 88.29,58.86 88.99,59.55 R1_PINH1.2 | 85.04,59.55 83.93,59.55 R2_PINH1.2 | 82.06,60.87 85.04,60.87 | 85.04,60.87 91.76,60.87 95.5,57.13 95.7,57.13 D7.2 95.84,56.99 v99.79,53.05 | 82.06,60.87 81.51,60.32 81.51,58.24 81.99,57.76 81.99,47.92 81.44,47.37 U3.2 | v160.11,21.12 165.23,21.12 J3.2 | v85.04,59.83 85.04,59.55 | v85.04,60.94 85.04,60.87 | J4.P4 4.92,94.8 5.54,94.8 13.3,87.05 13.3,83.86 C9.1 13.43,83.72 14.13,83.03 15.03,83.03 15.3,83.31 15.3,84.69 27.29,96.67 27.42,96.67 IC1.2 27.63,96.74 27.77,96.74 28.81,97.78 v28.81,107.55 | 3V3.TP 16.97,109.62 17.17,109.83 21.54,109.83 R_RESET.2 21.74,109.9 v22.58,109.9 | v41.62,109.9 40.65,109.9 R_BOOT.2 | v56.3,109.9 57.13,109.9 R_CHANGE.2 | R9.2 4.64,12.33 R8.2 | R8.2 9.83,12.33 14.75,12.33 R7.2 14.89,12.33 19.8,12.33 R6.2 19.94,12.33 R5.2 25.07,12.33 29.98,12.33 R10.2 30.05,12.46 30.05,12.88 v30.26,13.09 | v9.97,22.64 9.97,45.84 U2.2 | v9.9,13.09 9.9,12.46 R8.2 | 51.04,36.98 51.04,33.03 R1_PWRUSB1.2 50.9,32.89 42.52,24.52 v41.69,24.52 | 51.04,36.98 53.46,39.4 53.46,40.44 54.22,41.2 U1.7 54.29,41.34 54.29,42.45 U1.8 54.22,42.66 54.22,48.27 53.74,48.75 53.74,65.16 53.81,65.3 | U1.3 46.47,39.96 46.47,39.75 45.7,38.99 45.7,38.36 47.02,37.05 50.9,37.05 51.04,36.98 | 72.09,70.77 66.62,65.3 53.81,65.3 | 72.09,70.77 72.37,71.05 72.37,73.47 Q2.3 72.44,73.61 72.99,74.17 v72.99,74.31 | 53.81,65.3 52.08,67.03 C3.+ 51.94,66.97 51.31,66.34 44.74,66.34 44.18,66.89 44.18,68.77 45.64,70.22 45.64,73.89 C1_BAT2.1 45.84,73.89 v46.54,74.58 | v51.52,74.58 53.46,74.58 IC4.5 | v72.99,76.11 72.99,77.42 R_CL1.2
  Top 0.3: 72.09,70.77 81.92,60.94 82.06,60.87
  Bottom 0.3: v160.11,21.12 142.72,21.12 110.8,53.05 v99.79,53.05 | v85.04,60.94 v85.04,59.83 | v56.3,109.9 56.02,109.9 | 56.02,109.9 v41.62,109.9 41.48,109.97 41.13,110.31 28.81,110.31 | v22.58,109.9 25.41,109.9 25.83,110.31 28.81,110.31 | 28.81,110.31 v28.81,107.55 | v9.97,22.64 9.97,21.33 9.9,21.26 v9.9,13.09 | v46.54,74.58 v51.52,74.58 51.59,74.72 56.02,79.15 56.02,109.9 | v72.99,74.31 v72.99,76.11 | v41.69,24.52 v30.26,13.09
32KHZ
  Top 0.15: R2_PINH1.1 82.68,59.55 82.89,59.55 84.55,57.89 91.69,57.89 94.39,55.19 94.53,55.19 94.67,55.05 94.67,47.51 92.93,45.77 80.95,45.77 80.12,46.6 80.12,47.3 U3.1 80.05,46.6 76.94,46.6 54.36,24.03 36.22,24.03 18.91,41.34 18.91,45.84 U2.9
DN  (via drill 0.3)
  Top 0.15: 163.15,52.08 163.15,51.59 163.36,51.38 163.91,51.38 J2.B7 | 163.15,52.08 163.36,52.28 163.91,52.28 J2.A7 | v148.47,53.6 145.98,53.6 D1.1 | v163.01,52.15 163.08,52.08 163.15,52.08
  Bottom 0.15: v148.47,53.6 161.56,53.6 v163.01,52.15
DP  (via drill 0.3)
  Top 0.15: J2.A6 163.98,51.87 164.54,51.87 164.75,52.08 164.75,52.56 164.54,52.77 163.98,52.77 J2.B6 163.91,52.84 163.43,52.84 v163.01,53.25 | v146.88,55.54 145.98,55.54 D1.3
  Bottom 0.15: v146.88,55.54 160.73,55.54 v163.01,53.25
EPD_3V3  (via drill 0.3)
  Top 0.3: v79.71,71.4 73.41,71.4 Q2.2 | v89.96,81.65 90.86,82.55 EPD_3V3.TP | v123.68,32.69 123.06,33.31 C7.1 | v129.57,32.69 131.64,32.69 132.27,33.31 L1.2 | J1.16 83.38,15.44 83.79,15.44 J1.15 83.86,15.58 v83.86,16.48 | v83.58,19.74 77.08,26.25 76.94,26.25 EPD_C5.2
  Bottom 0.3: v89.96,81.65 v79.71,71.4 79.64,71.26 79.64,56.92 77.91,55.19 77.91,39.4 90.89,26.42 | v129.57,32.69 v123.68,32.69 123.54,32.62 121.6,32.62 120.08,31.09 95.56,31.09 90.89,26.42 | 83.86,19.46 v83.58,19.74 | v83.86,16.48 83.86,19.46 | 90.89,26.42 84,19.53 83.86,19.46
EPD_3V3_C  (via drill 0.3)
  Top 0.3: v71.47,74.31 71.47,71.4 Q2.1 | v71.47,76.66 71.47,77.21 71.67,77.42 R_CL1.1 | v31.37,73.68 21.47,63.78 21.47,63.36 U2.18 | v90.86,96.12 90.86,98.47 EPD_3V3_C.TP
  Bottom 0.3: v31.37,73.68 70.77,73.68 71.33,74.24 v71.47,74.31 v71.47,76.66 71.53,76.8 v90.86,96.12
EPD_BUSY  (via drill 0.3)
  Top 0.15: v82.82,19.25 83.79,19.25 86.84,16.2 86.84,15.44 J1.9 | v62.67,19.25 58.03,19.25 40.1,1.32 EPD_BUSY.TP | v22.58,51.8 11.29,63.09 11.29,63.29 U2.26
  Bottom 0.15: v82.82,19.25 v62.67,19.25 62.6,19.25 30.05,51.8 v22.58,51.8
EPD_CS  (via drill 0.3)
  Top 0.15: v85.39,16.2 85.39,15.44 J1.12 | v101.38,3.46 101.38,1.32 EPD_CS.TP | v29.22,20.98 29.98,21.74 D6.2 | R9.1 4.57,11.08 4.57,11.22 3.95,11.84 3.95,12.74 10.73,19.53 v27.77,19.53 27.77,19.46 28.39,18.84 v28.39,14.34 | v29.22,31.65 21.47,39.4 21.47,45.84 U2.11
  Bottom 0.15: v85.39,16.2 88.64,16.2 91.72,13.12 | v101.38,3.46 91.72,13.12 | v27.77,19.53 v29.22,20.98 v29.22,31.65 | 91.72,13.12 89.06,10.46 32.27,10.46 v28.39,14.34
EPD_DC  (via drill 0.3)
  Top 0.15: v82.82,18.63 82.82,18.14 83.17,17.8 84.42,17.8 85.87,16.34 85.87,15.44 J1.11 | v14.54,47.02 14.54,46.88 13.85,46.19 13.85,45.91 U2.5 | v3.25,34.56 1.32,32.62 EPD_DC.TP
  Bottom 0.15: v82.82,18.63 62.67,18.63 33.79,47.51 15.03,47.51 v14.54,47.02 14.54,46.95 3.25,35.66 v3.25,34.56
EPD_RST  (via drill 0.3)
  Top 0.15: v83.31,18.28 84.35,18.28 86.28,16.34 86.28,15.44 J1.10 | v76.73,11.7 59.49,11.7 49.1,1.32 EPD_RST.TP | v28.39,52.28 17.66,63.02 17.66,63.29 U2.21
  Bottom 0.15: v76.73,11.7 v83.31,18.28 83.31,19.39 59.21,43.49 41,43.49 32.2,52.28 v28.39,52.28
FLASH_CS  (via drill 0.3)
  Top 0.15: v24.1,11.77 24.79,11.08 24.93,11.08 R5.1 | v20.64,20.98 19.88,21.74 D9.2 | 25.76,42.52 U1.1 | 25.76,42.52 22.71,45.57 22.71,45.84 U2.12 | v24.17,40.86 25.76,42.45 25.76,42.52
  Bottom 0.15: v24.1,11.77 24.1,17.52 v20.64,20.98 20.64,37.33 v24.17,40.86
GDR
  Top 0.15: J1.2 90.37,15.44 90.37,15.79 109.83,35.25 123.47,35.25 123.68,35.46 123.68,37.88 124.23,38.43 R4.2 124.37,38.43 125,39.06 128.94,39.06 Q3.1
GND  (via drill 0.3)
  Top 0.3: U3.13 83.86,56.65 83.86,57.13 81.99,59 81.99,60.18 82.2,60.39 91.62,60.39 95.08,56.92 95.08,56.02 96.05,55.05 96.05,52.63 95.5,52.08 C8.2 95.43,51.94 95.43,48.54 95.77,48.2 C10_SUPERCAP.2 95.7,48.06 95.7,38.23 92.59,35.11 92.59,27.77 EPD_C1.1 92.52,27.63 91.48,27.63 EPD_C2.1 91.41,27.49 87.39,23.48 87.39,15.51 J1.8 87.32,15.37 87.32,14.96 | D3.1 79.01,35.52 79.01,29.85 76.94,27.77 EPD_C5.1 76.87,27.63 75.97,27.63 EPD_C6.1 75.83,27.56 75,27.56 EPD_C7.1 74.79,27.63 73.96,27.63 EPD_C8.1 73.75,27.63 72.92,27.63 EPD_C9.1 72.78,27.63 71.88,27.63 EPD_C10.1 71.67,27.63 70.84,27.63 EPD_C11.1 70.7,27.63 69.67,27.63 EPD_C12.1 69.6,27.49 68.9,26.8 | 82.79,14.92 82.82,14.96 82.82,15.37 J1.17 | 82.79,14.92 80.81,12.95 78.39,12.95 J1.MP2 78.32,13.09 68.9,22.51 68.9,26.8 | 87.32,14.96 87.05,14.68 83.03,14.68 82.79,14.92 | 87.32,14.96 87.39,14.82 89.26,12.95 91.83,12.95 J1.MP1 91.96,13.02 125.34,13.02 125.62,13.3 C2.2 | C4_USB.2 147.99,46.4 147.99,48.82 149.09,49.93 R2-USB1.1 149.09,50.14 149.09,50.97 R2-USB2.1 149.03,51.11 149.03,54.15 | C5_USB.2 146.39,46.4 146.39,46.95 144.32,49.03 144.32,54.08 143.83,54.57 143.49,54.57 D1.5 143.9,54.71 144.32,55.12 144.32,55.26 145.22,56.16 147.02,56.16 149.03,54.15 | J2.B12 163.98,48.96 163.98,48.75 J2.A1 164.05,48.61 164.05,47.44 164.47,47.02 J2.MP3 | 166.55,46.95 164.68,46.95 J2.MP3 | 166.55,46.95 168.42,46.95 J2.MP1 | 166.55,57.2 164.68,57.2 J2.MP4 164.47,57.13 164.05,56.72 164.05,55.54 J2.A12 163.98,55.4 163.98,55.12 J2.B1 163.84,55.05 163.22,55.05 162.39,54.22 149.16,54.22 149.03,54.15
  Top 0.3: 166.55,57.2 168.42,57.2 J2.MP2 | 166.55,57.2 166.55,46.95 | U4.9 153.67,12.67 153.67,12.53 153.11,11.98 152.7,11.98 U4.4 152.56,11.98 139.75,11.98 137.74,13.99 130.19,13.99 129.64,13.43 C1.2 129.5,13.37 128.53,13.37 | U4.6 154.63,12.46 153.8,12.46 U4.9 | U4.1 152.7,13.43 153.04,13.43 153.67,12.81 U4.9 | 160.31,20.08 165.23,20.08 J3.1 | 160.31,20.08 153.46,13.23 U4.9 | R4.1 123.06,38.5 124.23,39.68 129.57,39.68 129.77,39.47 129.77,37.4 129.64,37.26 128.04,37.26 124.3,33.52 C7.2 124.37,33.24 124.37,31.99 125.69,30.68 125.69,13.5 C2.2 | 128.53,13.37 125.76,13.37 C2.2 | 130.19,7.55 130.19,6.92 129.71,6.44 129.36,6.44 SENSOR2.5 | 130.19,7.55 129.77,7.96 129.36,7.96 SENSOR2.7 129.22,8.03 129.01,8.03 128.53,8.52 128.53,13.37 | SENSOR2.1 132.27,8.79 131.51,8.79 130.33,7.62 130.19,7.55 | J2.MP3 164.54,46.81 164.54,26.32 159.55,21.33 159.55,20.91 160.24,20.22 160.31,20.08 | D6.1 29.98,20.29 25.07,20.29 D8.1 24.93,20.29 20.01,20.29 D9.1 19.8,20.29 14.89,20.29 D10.1 14.75,20.29 9.83,20.29 D11.1 9.7,20.29 4.64,20.29 D12.1 4.57,20.43 3.81,21.19 3.81,41.62 | U2.29_1 13.23,51.87 13.23,53.05 U2.29_2 | U2.29_2 13.16,53.25 13.16,54.29 U2.29_3 13.16,54.5 8.73,58.93 8.73,63.29 U2.28 8.73,63.5 v8.73,64.61 | U2.29_1 13.37,51.87 14.4,51.87 U2.29_4 14.54,51.87 15.65,51.87 U2.29_7 15.72,52.01 15.72,53.05 U2.29_8 | U2.29_2 13.37,53.12 14.4,53.12 U2.29_5 14.47,53.25 14.47,54.29 U2.29_6 14.61,54.36 15.65,54.36 U2.29_9 | U2.29_1 13.16,51.73 8.73,47.3 8.73,45.91 U2.1 8.66,45.77 4.5,41.62 3.81,41.62 | 3.81,41.62 1.45,41.62 GND..TP | R1_PWRUSB.1 59.21,74.31 59.21,73.68 59.9,72.99 59.9,66 59.69,65.79 56.3,65.79 52.08,70.01 C3.- 51.94,69.94 49.1,69.94 45.98,66.83 44.87,66.83 44.67,67.03 44.67,68 45.36,68.7 C1_BAT1.2 45.5,68.83 45.64,68.83 49.34,72.54
  Top 0.3: U1.4 46.54,38.71 48.48,38.71 50.34,40.58 U1.9 | R2_BAT.1 56.51,88.85 56.65,88.85 57.34,88.16 58.31,88.16 58.45,88.29 58.45,93.21 57.82,93.83 C1_BAT.2 57.76,94.04 57.06,94.73 56.02,94.73 55.33,94.04 52.77,94.04 C2_BAT.2 52.7,93.83 v52.7,92.66 | 49.34,72.54 50.41,73.61 50.62,73.61 IC4.2 | 46.67,75.21 45.7,75.21 C1_BAT2.2 45.64,75.07 43.7,73.13 43.7,66.76 50.28,60.18 50.28,40.72 U1.9 | 49.34,72.54 46.67,75.21 | 51.56,90.61 50.55,89.61 47.23,89.61 46.95,89.33 46.95,85.04 | 51.56,90.61 52.01,91.06 52.01,91.41 MCP73831.2 | 46.95,85.04 46.95,75.55 46.74,75.34 46.67,75.21 | v51.66,90.51 51.56,90.61 | GND.TP 90.86,90.65 84,90.65 64.89,109.76 C10.2 64.75,109.83 64.19,109.83 62.88,108.52 62.74,108.52 CHANGE_BUTTON.2 62.6,108.52 59.28,108.52 CHANGE_BUTTON.1 59.07,108.44 58.24,108.44 57.55,107.75 49.44,107.75 49.17,108.03 49.03,108.1 | C9.2 14.68,83.86 14.68,88.92 15.44,89.68 J4.G1 15.58,89.82 16.41,90.65 16.41,93.56 15.51,94.46 15.51,95.43 J4.G2 | C_DELAY.2 1.87,104.29 3.05,103.11 3.05,100.69 2.29,99.93 J4.G4 2.35,99.79 2.35,99.31 4.57,97.09 4.85,97.09 J4.P6 | J4.P6 4.5,96.95 1.25,93.69 1.25,86.77 J4.G3 1.32,86.63 v8.73,79.22 | J4.G2 15.37,95.5 7.06,95.5 5.61,96.95 4.99,96.95 J4.P6 | 49.03,108.1 49.03,109.07 48.27,109.83 C6.2 | 49.03,108.1 48.82,107.89 46.81,107.89 46.26,108.44 BOOT_BUTTON.2 46.05,108.44 42.73,108.44 BOOT_BUTTON.1 42.59,108.38 41.97,107.75 39.61,107.75 37.46,109.9 29.98,109.9 | 29.98,109.9 29.36,109.9 C5.2 29.15,109.83 28.67,109.83 27.35,108.52 27.21,108.52 RESET_BUTTON.2 27.01,108.52 23.68,108.52 RESET_BUTTON.1 23.55,108.38 23.55,104.43 15.44,96.33 15.44,95.63 J4.G2
  Top 0.3: 29.98,109.9 29.98,108.1 29.5,107.61 29.5,97.5 27.77,95.77 27.63,95.77 IC1.3 27.49,95.7 27.49,91.34 29.71,89.12 SJ1.1 29.78,88.99 29.78,86.28 R1.1 29.92,86.22 31.09,85.04 46.95,85.04 | v64.82,26.87 68.77,26.87 68.9,26.8 | v52.49,39.2 51.8,39.2 50.48,40.51 U1.9
  Bottom 0.3: v52.7,92.66 52.7,91.55 v51.66,90.51 | v8.73,79.22 v8.73,64.61 | v52.49,39.2 v64.82,26.87
  pour Top: -0.92,-0.92 170.92,-0.92 170.92,111.92 -0.92,111.92
  pour Bottom: -0.92,-0.92 170.92,-0.92 170.92,111.92 -0.92,111.92
GPIO8  (via drill 0.3)
  Top 0.15: v32.69,33.03 49.65,33.03 R1_PWRUSB1.1 | v20.98,44.74 20.15,45.57 20.15,45.84 U2.10
  Bottom 0.15: v20.98,44.74 v32.69,33.03
I2C_PW  (via drill 0.3)
  Top 0.3: R_CL2.2 137.12,13.37 133.38,13.37 R_CL3.2 133.31,13.23 132.61,12.53 132.61,9.35 | 129.5,9.35 129.5,9 129.36,8.86 SENSOR2.8 | 129.5,9.35 129.5,12.05 C1.1 | 129.5,9.35 132.61,9.35 | 132.61,9.35 132.89,9.35 133.1,9.14 133.1,8.52 132.61,8.03 132.34,8.03 SENSOR2.2 132.13,7.96 131.85,7.96 130.19,6.3 130.19,6.09 129.91,5.82 128.81,5.82 128.53,6.09 128.53,6.79 128.87,7.13 SENSOR2.6 129.29,7.27 128.94,7.27 125.76,10.46 125.76,12.05 C2.1 125.62,12.12 78.11,12.12 70.5,19.74 v66.55,19.74 | v43.28,43 34.83,51.45 34.83,51.52 32.69,53.67 31.99,53.67 22.71,62.95 22.71,63.29 U2.17
  Bottom 0.3: v66.55,19.74 v43.28,43
INT_RTC  (via drill 0.3)
  Top 0.15: v86.98,59.42 87.12,59.55 87.67,59.55 R1_PINH1.1 | v82.68,55.12 82.68,47.37 U3.3 | v25.14,53.67 17.66,46.19 17.66,45.91 U2.8 | v81.16,53.67 v77.35,53.67 | v92.1,64.47 115.99,64.47 INT_RTC.TP
  Bottom 0.15: v77.35,53.67 v25.14,53.67 | v81.16,53.67 82.61,55.12 v82.68,55.12 v86.98,59.42 87.05,59.42 v92.1,64.47
IO/BOOT  (via drill 0.3)
  Top 0.15: C6.1 48.2,108.58 47.64,108.58 46.26,109.97 BOOT_BUTTON.3 42.73,109.97 BOOT_BUTTON.4 42.66,109.97 41.27,108.58 40.65,108.58 R_BOOT.1 40.58,108.52 40.37,108.31 v39.82,108.31 | v25.28,66.83 25.28,63.36 U2.15
  Bottom 0.15: v25.28,66.83 25.28,92.93 39.82,107.48 v39.82,108.31
IO/CHANGE  (via drill 0.3)
  Top 0.15: v63.92,108.79 64.13,108.58 64.75,108.58 C10.1 | v63.78,110.18 62.88,110.18 62.74,110.04 CHANGE_BUTTON.3 62.67,109.97 59.28,109.97 CHANGE_BUTTON.4 59.21,110.04 57.76,108.58 57.2,108.58 R_CHANGE.1 57.13,108.52 56.92,108.31 v55.47,108.31 | v31.65,84.48 15.1,67.93 15.1,63.36 U2.23
  Bottom 0.15: v63.92,108.79 63.92,110.04 v63.78,110.18 | v55.47,108.31 v31.65,84.48
MISO  (via drill 0.3)
  Top 0.15: v6.03,97.36 5.26,98.13 5.12,98.13 J4.P7 | v6.03,78.32 1.32,73.61 MISO.TP | v8.93,11.77 9,11.77 9.7,11.08 R8.1 | v5.4,20.98 4.64,21.74 D12.2 | v21.95,40.37 24.31,40.37 25.14,41.2 46.47,41.2 U1.2 | v16.83,47.02 16.83,54.98 10.04,61.77 10.04,63.29 U2.27 9.97,63.43 9.97,63.99 v8.17,65.79
  Bottom 0.15: v6.03,97.36 v6.03,78.32 6.03,67.93 v8.17,65.79 | v8.93,11.77 8.93,17.45 v5.4,20.98 5.4,29.22 16.55,40.37 16.83,40.37 | 16.83,40.37 v21.95,40.37 | 16.83,40.37 v16.83,47.02
MOSI  (via drill 0.3)
  Top 0.15: v84.42,16.2 84.35,16.14 84.35,15.44 J1.14 | v89.26,11.36 96.19,11.36 106.23,1.32 MOSI.TP | v54.71,25 54.29,25.41 54.29,38.64 U1.5 | v13.99,11.77 14.06,11.77 14.75,11.08 R7.1 | v10.46,21.05 9.76,21.74 D11.2 | v16.27,32.83 16.27,45.84 U2.7 16.34,45.91 16.34,54.85 v12.05,59.14 | v12.05,87.46 5.82,93.69 5.12,93.69 J4.P3
  Bottom 0.15: v89.26,11.36 v84.42,16.2 84.35,16.2 78.88,10.73 69.73,10.73 55.47,25 v54.71,25 38.36,25 24.38,11.01 14.82,11.01 14.06,11.77 v13.99,11.77 13.99,17.52 v10.46,21.05 10.46,21.12 16.27,26.94 v16.27,32.83 | v12.05,59.14 v12.05,87.46
N$1
  Top 0.15: R2-USB1.2 150.41,50 162.6,50 163.36,50.76 163.91,50.76 J2.A5
N$2
  Top 0.15: R2-USB2.2 150.41,51.04 160.18,51.04 162.94,53.81 163.91,53.81 J2.B5
N$3
  Top 0.15: C1_BAT1.1 45.5,67.52 50.62,72.64 IC4.3 50.69,72.64 51.38,73.34 | 51.38,73.34 51.38,74.03 50.83,74.58 50.69,74.58 IC4.1 50.83,74.65 52.98,76.8 52.98,77.7 Q1.2 | D2.1 59.14,66.55 58.24,66.55 51.45,73.34 51.38,73.34
N$4  (via drill 0.3)
  Top 0.15: v46.26,91.62 46.26,88.92 CHG_LED.C | v46.26,93.14 46.26,93.9 46.33,93.97 R1_BAT.1
  Bottom 0.15: v46.26,93.14 v46.26,91.62
N$5
  Top 0.15: R2_BAT.2 57.76,88.92 57.62,88.92 56.92,89.61 53.74,89.61 53.05,88.92 MCP73831.5
N$6  (via drill 0.3)
  Top 0.15: v121.05,32.83 122.99,30.89 C4.1 | v83.38,34.76 82.61,35.52 D3.2 82.55,35.59 81.92,36.22 70.01,36.22 69.39,35.59 67.24,35.59 D4.1
  Bottom 0.15: v121.05,32.83 85.32,32.83 v83.38,34.76
N$7
  Top 0.15: R1_BAT.2 50.28,93.97 51.94,92.31 52.42,92.31 52.98,91.76 52.98,91.48 MCP73831.1
N$8
  Top 0.15: J1.24 79.29,15.44 79.29,16.62 69.67,26.25 EPD_C12.2
N$9  (via drill 0.3)
  Top 0.15: v30.05,98.33 30.26,98.13 30.26,97.64 IC1.5 | v2.49,102.35 1.87,102.97 C_DELAY.1
  Bottom 0.15: v30.05,98.33 6.51,98.33 v2.49,102.35
N$10
  Top 0.15: J1.22 80.33,15.44 80.33,17.66 71.74,26.25 EPD_C10.2
N$11
  Top 0.15: J1.4 89.4,15.44 89.4,23.13 92.52,26.25 EPD_C1.2
N$12
  Top 0.15: J1.5 88.85,15.44 88.85,23.68 91.41,26.25 EPD_C2.2
N$13
  Top 0.15: D7.1 93.69,57.06 93.69,56.44 95.36,54.78 95.36,54.57 R_CAPACITOR.2
N$14
  Top 0.15: J1.20 81.3,15.44 81.3,18.7 73.75,26.25 EPD_C8.2
N$15
  Top 0.15: J1.19 81.78,15.44 81.78,19.25 74.79,26.25 EPD_C7.2
N$16
  Top 0.15: J1.18 82.34,15.44 82.34,19.74 75.83,26.25 EPD_C6.2
PREVGH
  Top 0.15: J1.21 80.81,15.44 80.81,18.14 72.85,26.11 72.85,26.25 EPD_C9.2 72.85,26.32 72.85,26.45 73.27,26.87 77.28,26.87 85.94,35.52 90.92,35.52 D5.1
PREVGL  (via drill 0.3)
  Top 0.15: 71.29,25.59 70.77,26.11 70.77,26.25 EPD_C11.2 | 71.29,25.59 79.78,17.11 79.78,15.44 J1.23 | v70.7,28.32 70.7,35.52 D4.2 | v71.26,25.55 71.29,25.59
  Bottom 0.15: v70.7,28.32 70.7,26.11 v71.26,25.55
RESE
  Top 0.15: J1.3 89.89,15.37 89.89,15.03 90.16,14.75 102.35,14.75 122.57,34.97 123.61,34.97 124.23,35.59 124.23,35.87 R3.2 124.3,35.94 126.1,37.74 128.94,37.74 Q3.2
RESE'  (via drill 0.3)
  Top 0.15: SJ1.2 31.23,89.06 31.16,88.99 31.16,86.28 R1.2 31.23,86.28 31.92,85.59 v33.38,85.59 | v60.04,74.79 79.22,74.79 118.07,35.94 122.99,35.94 R3.1
  Bottom 0.15: v60.04,74.79 52.35,74.79 51.66,74.1 44.87,74.1 v33.38,85.59
RESET  (via drill 0.3)
  Top 0.15: R_RESET.1 21.61,108.58 22.23,108.58 23.61,109.97 RESET_BUTTON.4 23.68,109.97 26.04,109.97 | 26.04,109.97 RESET_BUTTON.3 | 28.22,107.58 29.15,108.52 C5.1 | 28.22,107.58 27.49,106.85 27.49,97.64 IC1.1 27.42,97.71 v26.66,96.95 | v14.06,51.04 11.29,48.27 11.29,45.91 U2.3 | v26.04,109.76 26.04,109.97 | v28.18,107.61 28.22,107.58
  Bottom 0.15: v14.06,51.04 14.06,84.35 v26.66,96.95 | v28.18,107.61 v26.04,109.76
RTC_RST  (via drill 0.3)
  Top 0.15: v35.39,51.66 23.96,63.09 23.96,63.29 U2.16 | v77.35,51.66 80.81,48.2 80.81,46.33 81.09,46.05 82.96,46.05 83.86,46.95 83.86,47.3 U3.4
  Bottom 0.15: v77.35,51.66 v35.39,51.66
RX
  Top 0.15: U2.24 13.78,63.64 6.86,70.57 1.32,70.57 RX.TP
SCK  (via drill 0.3)
  Top 0.15: v82.82,16.97 84.28,16.97 84.9,16.34 84.9,15.44 J1.13 | v77.08,11.22 67.1,11.22 57.2,1.32 SCK.TP | v55.19,25.48 55.19,38.78 54.29,39.68 54.29,39.96 U1.6 | v19.04,11.77 19.11,11.77 19.8,11.08 R6.1 | v15.58,20.98 14.82,21.74 D10.2 14.82,21.81 15.03,22.02 15.03,45.84 U2.6 15.03,45.91 15.03,47.16 v13.57,48.61 | v13.57,87.6 5.26,95.91 5.12,95.91 J4.P5
  Bottom 0.15: v82.82,16.97 v77.08,11.22 69.67,11.22 55.4,25.48 v55.19,25.48 38.43,25.48 24.24,11.29 19.6,11.29 19.11,11.77 v19.04,11.77 19.04,17.52 v15.58,20.98 | v13.57,48.61 v13.57,87.6
SCL  (via drill 0.3)
  Top 0.15: 137.12,11.56 137.12,11.01 132.54,6.44 132.34,6.44 SENSOR2.4 | 137.12,11.56 137.12,12.05 R_CL2.1 137.05,11.77 v136.35,11.77 | 155.19,13.02 159.48,13.02 166.13,19.67 166.13,22.51 165.58,23.06 165.3,23.06 J3.4 | 155.19,13.02 154.7,13.02 U4.7 | 137.12,11.56 155.05,11.56 155.19,11.7 155.19,13.02 | v24.38,57.62 18.91,63.09 18.91,63.29 U2.20 | v79.08,57.62 80.05,56.65 U3.16 80.05,56.58 v78.94,55.47
  Bottom 0.15: v79.08,57.62 v24.38,57.62 | v136.35,11.77 136.35,26.94 114.82,48.48 79.29,48.48 78.94,48.82 v78.94,55.47
SDA  (via drill 0.3)
  Top 0.15: SENSOR2.3 132.34,7.27 132.54,7.27 133.51,8.24 133.51,9.28 133.38,9.42 133.38,12.05 R_CL3.1 133.44,12.05 136.01,12.05 136.56,12.6 v138.36,12.6 | v156.02,13.5 154.7,13.5 U4.8 | v164.19,21.68 164.88,21.68 165.23,22.02 J3.3 | v23.96,59.28 20.15,63.09 20.15,63.29 U2.19 | v79.08,59.28 81.37,56.99 U3.15 81.37,56.58 81.37,56.3 79.22,54.15 v78.46,54.15
  Bottom 0.15: v164.19,21.68 v156.02,13.5 155.95,13.5 155.05,12.6 v138.36,12.6 137.81,12.6 136.49,11.29 136.22,11.29 130.05,17.45 130.05,32.83 114.68,48.2 79.15,48.2 78.46,48.89 v78.46,54.15 | v79.08,59.28 v23.96,59.28
SRC  (via drill 0.3)
  Top 0.15: v125.07,30.54 124.79,30.82 124.3,30.82 C4.2 | v126.66,32.13 126.66,32.27 127.7,33.31 L1.1 127.77,33.38 131.02,36.63 131.02,38.43 Q3.3 | v99.51,30.54 94.53,35.52 D5.2
  Bottom 0.15: v126.66,32.13 v125.07,30.54 v99.51,30.54
SS_SD  (via drill 0.3)
  Top 0.15: 25.69,22.51 30.54,22.51 30.75,22.3 30.75,11.91 30.05,11.22 30.05,11.08 R10.1 | 25.69,22.51 25,21.81 D8.2 | v12.53,35.73 12.53,45.84 U2.4 12.53,45.91 v12.53,47.02 | v15.79,32.48 25.69,22.58 25.69,22.51 | v12.53,85.59 5.54,92.59 J4.P2
  Bottom 0.15: v15.79,32.48 v12.53,35.73 | v12.53,47.02 v12.53,85.59
TX
  Top 0.15: U2.25 12.46,63.36 12.46,63.64 8.52,67.59 1.32,67.59 TX.TP
USB_D+  (via drill 0.3)
  Top 0.3: v133.86,55.54 143.42,55.54 D1.4 | v54.29,53.12 v81.44,53.12 | v32.48,53.12 25.28,45.91 U2.14
  Bottom 0.3: v133.86,55.54 83.86,55.54 v81.44,53.12 | v32.48,53.12 v54.29,53.12
USB_D-  (via drill 0.3)
  Top 0.3: v135.8,53.6 143.42,53.6 D1.6 | v54.29,48.96 v79.43,48.96 | v36.15,48.96 29.92,48.96 25.76,44.8 24.65,44.8 23.96,45.5 23.96,45.84 U2.13
  Bottom 0.3: v135.8,53.6 84.07,53.6 v79.43,48.96 | v36.15,48.96 v54.29,48.96
VBAT  (via drill 0.3)
  Top 0.3: MCP73831.3 51.11,91.48 47.16,91.48 45.7,92.93 45.7,94.6 45.84,94.73 50.07,94.73 50.76,94.04 51.38,94.04 C2_BAT.1 51.52,94.11 52.63,95.22 57.76,95.22 58.93,94.04 58.93,88.16 | 58.93,88.16 52.08,81.3 Q1.3 | U4.3 152.7,12.46 152.7,12.95 U4.2 152.56,12.95 152.28,12.95 133.1,32.13 133.1,37.6 v106.71,63.99 | v91.69,73.41 91.69,73.82 90.92,74.58 VBAT.TP 90.79,74.65 77.35,88.09 59.07,88.09 58.93,88.16
  Bottom 0.3: v106.71,63.99 94.8,63.99 91.69,67.1 v91.69,73.41
VBUS
  Top 0.3: CHG_LED.A 47.78,88.92 51.11,88.92 MCP73831.4 | C1_BAT.1 56.44,93.97 56.44,93.56 51.87,88.99 51.24,88.99 MCP73831.4 | 58.45,74.93 58.45,73.82 59.14,73.13 59.14,68.7 D2.2 | 58.45,74.93 59.14,75.62 R1_PWRUSB.2 59.28,75.55 83.24,75.55 92.93,65.86 122.92,65.86 124.23,64.54 VBUS.TP 124.37,64.47 124.37,64.26 143.56,45.08 146.26,45.08 C5_USB.1 146.46,45.08 147.16,45.08 | 58.45,74.93 58.31,75 54.78,78.53 52.56,78.53 51.8,77.77 51.18,77.77 Q1.1 51.11,77.91 51.11,88.78 MCP73831.4 | 147.16,45.08 147.92,45.08 C4_USB.1 147.99,44.94 151.24,41.69 151.24,40.51 PFMF.050.1.2 | 147.16,45.08 147.16,46.81 145.01,48.96 145.01,54.08 145.49,54.57 145.91,54.57 D1.2
VRTC
  Top 0.3: C10_SUPERCAP.1 93.63,48.2 93.63,51.52 93.97,51.87 C8.1 94.11,52.01 94.11,54.5 R_CAPACITOR.1 93.97,54.64 84.21,54.64 82.68,56.16 82.68,56.58 U3.14
VUSB
  Top 0.3: J2.A9 163.98,54.57 163.98,54.36 J2.B4 164.12,54.29 164.61,54.29 165.16,53.74 165.16,50.34 164.68,49.86 164.12,49.86 J2.B9 163.98,49.79 163.98,49.58 J2.A4 163.84,49.51 163.29,49.51 155.81,42.03 155.81,40.51 PFMF.050.1.1